# Altium PCB PCB1.PcbDoc
Units mil, origin at the board's own origin, x right, y up, seen from the top; angles counter-clockwise.
Board outline 5850 x 3845 mil, 2 copper layers (Top Layer, Bottom Layer); 70 components, 58 nets, 203 pads, 61 vias.
Unrouted connection lines stored in the file: 44.
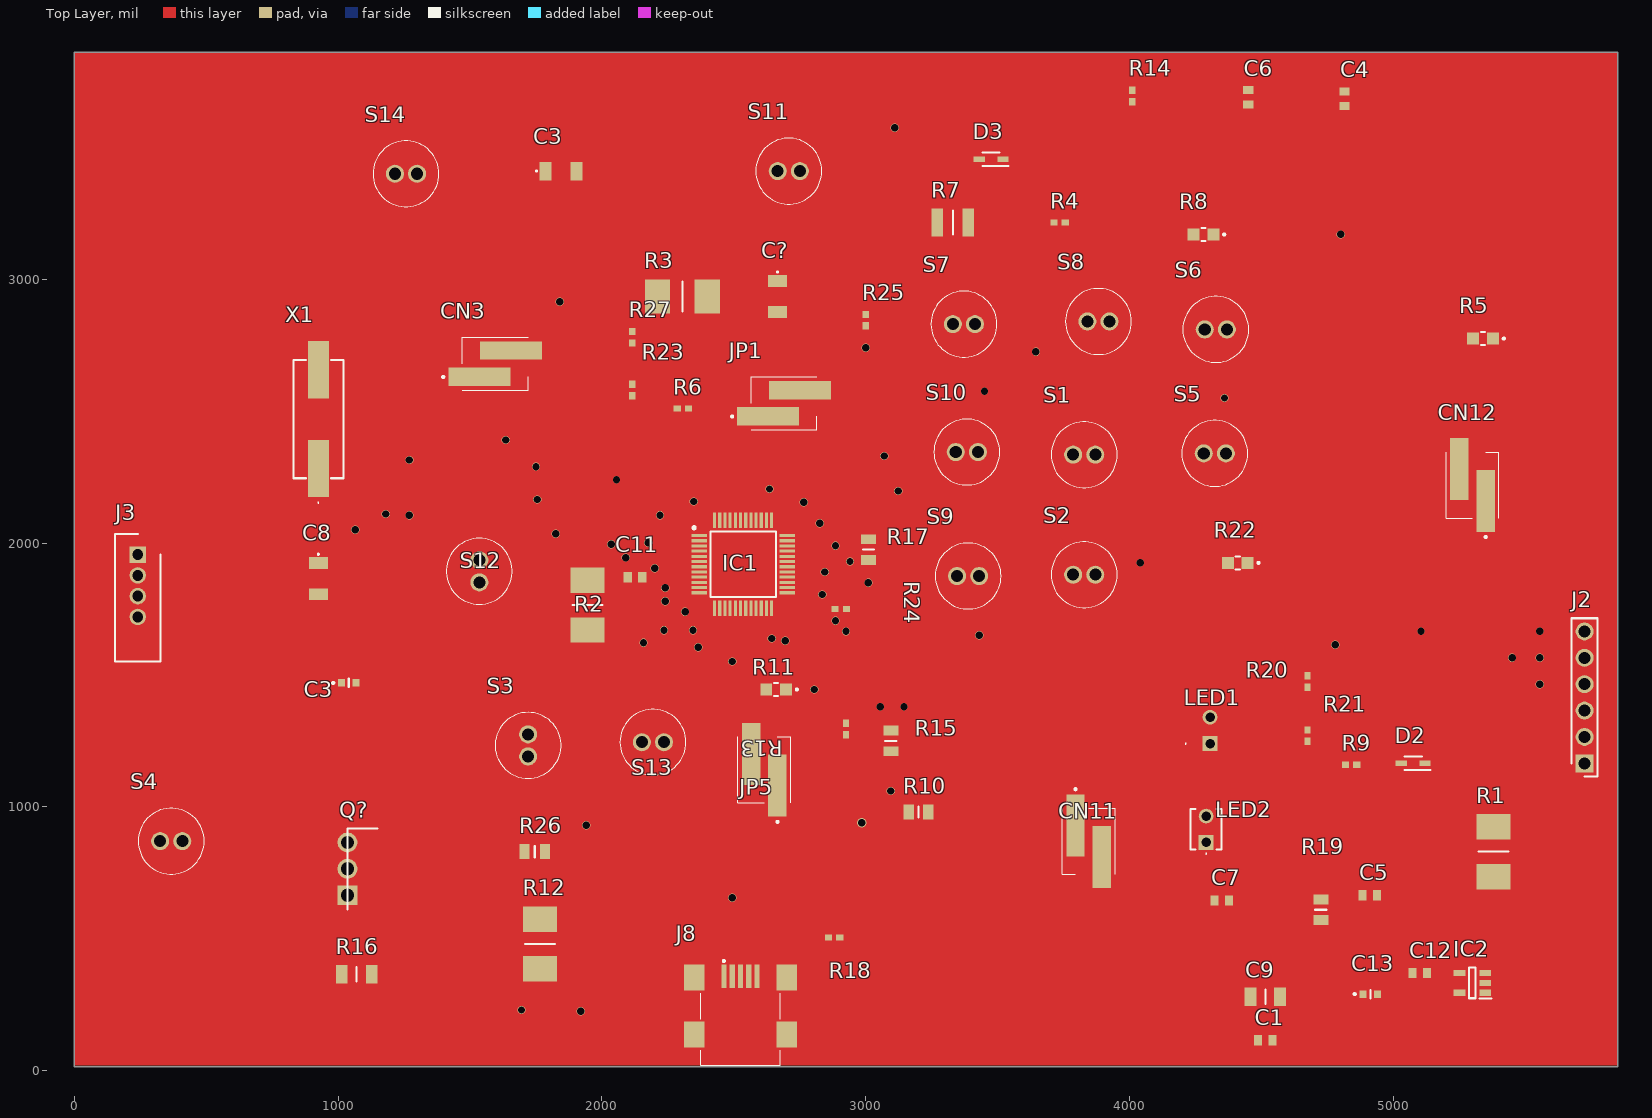
[diagram p0: Top Layer view]
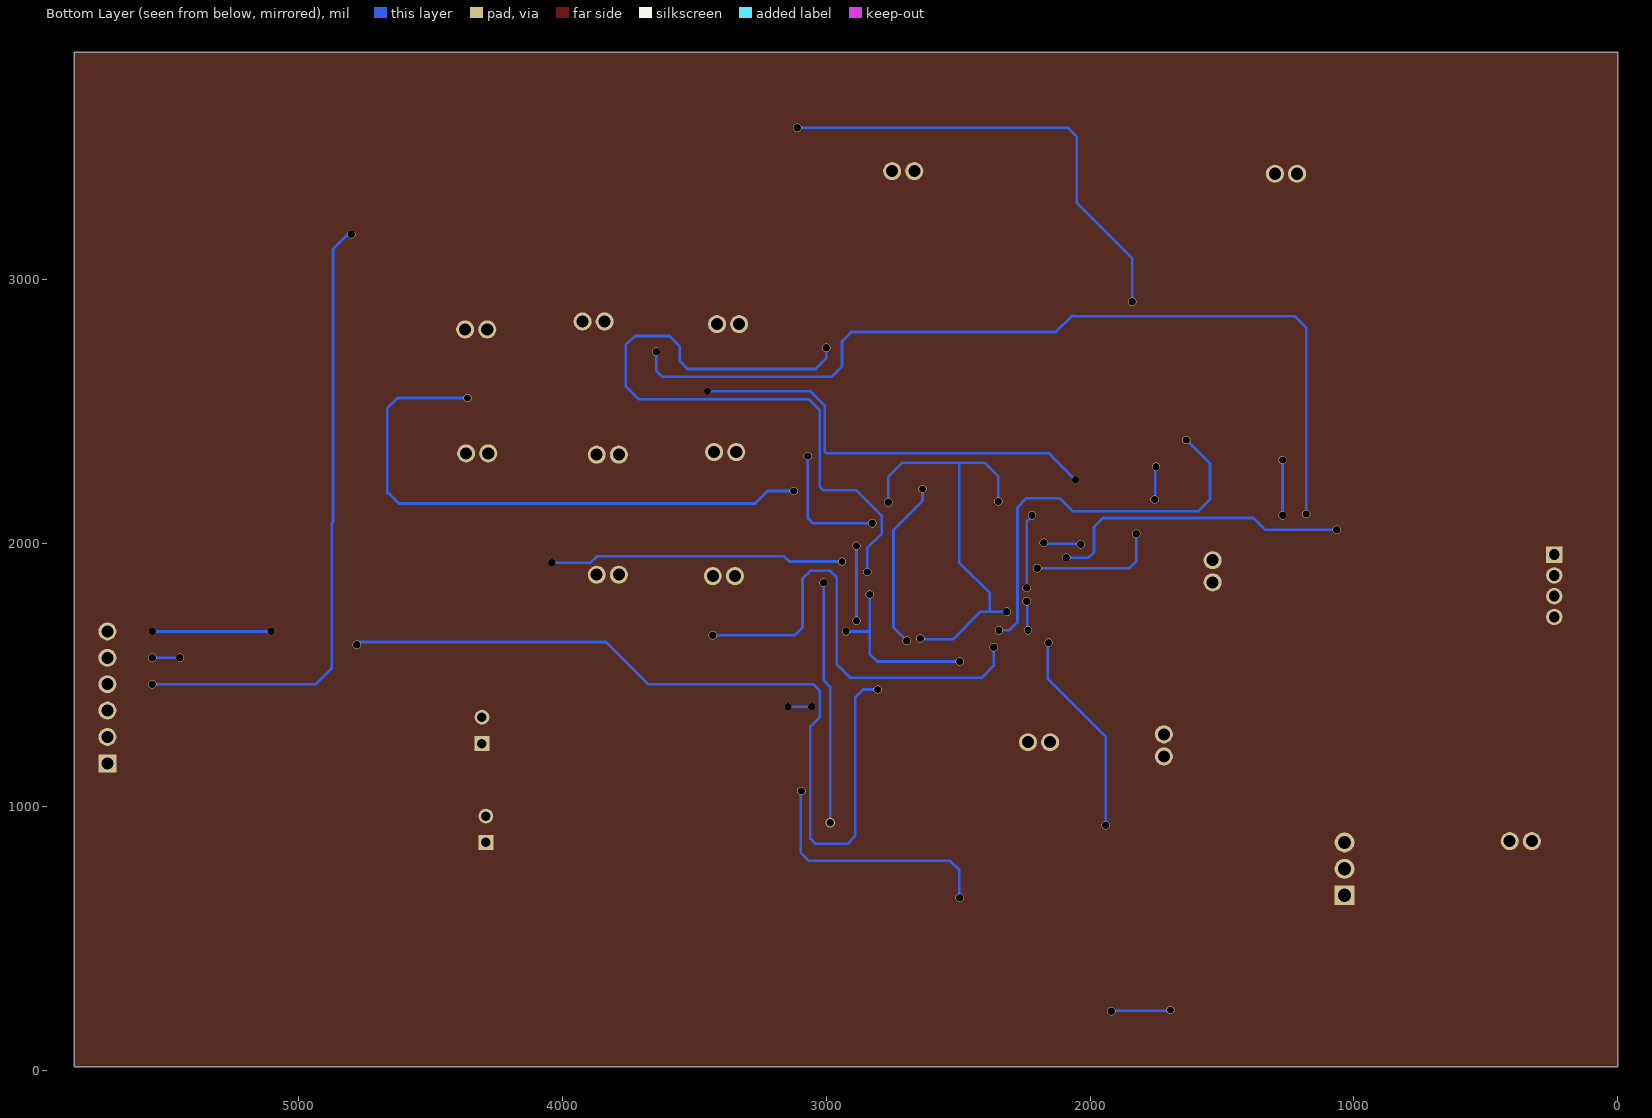
[diagram p1: Bottom Layer view, seen from below]
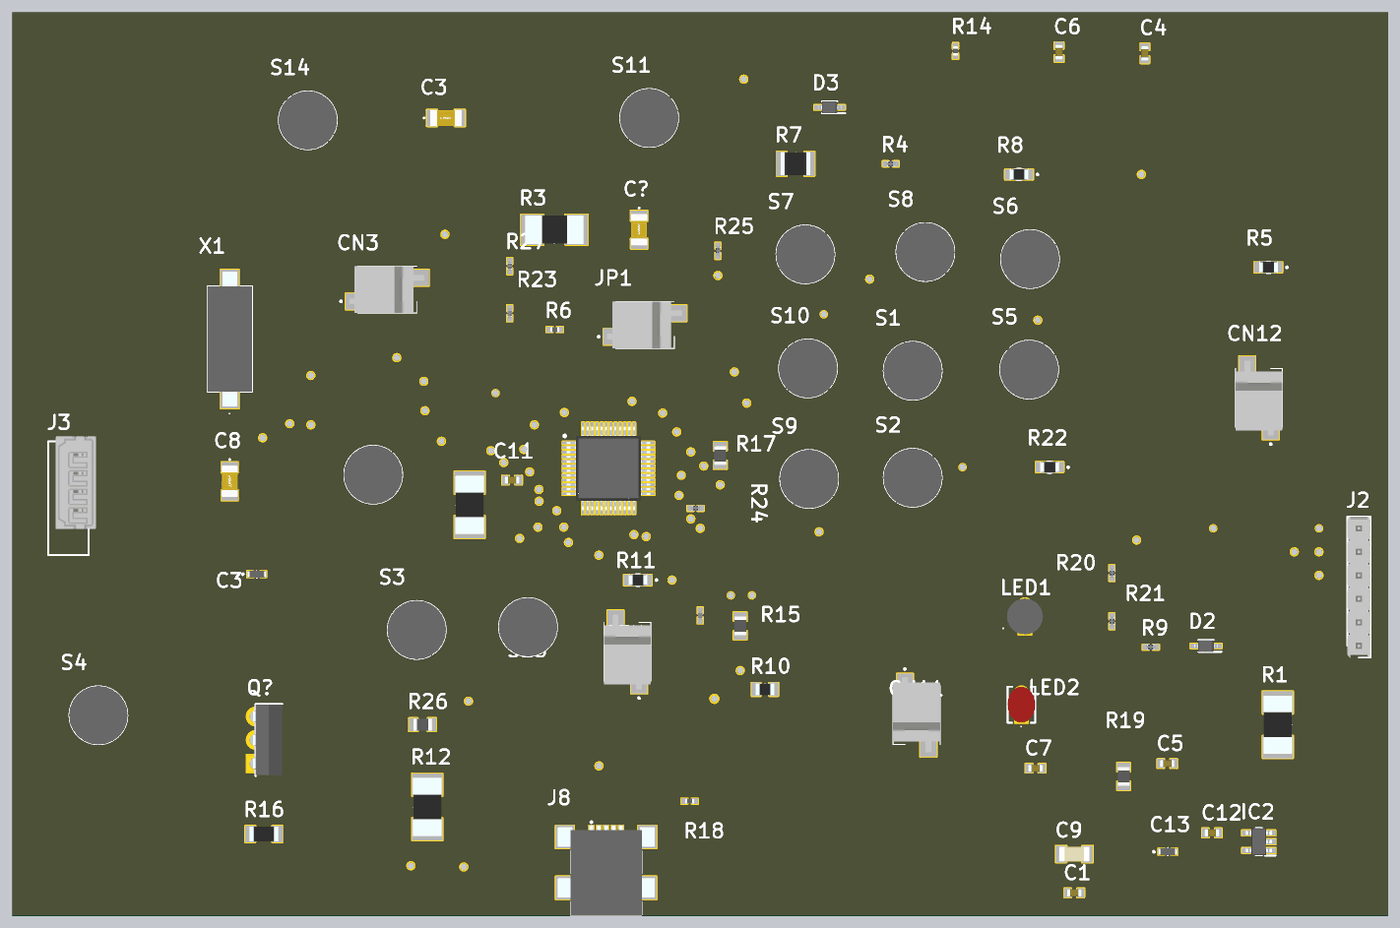
[diagram p2: 3D render of the assembled board from above, using the file's embedded part models]

## Layer stack, top to bottom
Top Solder: solder mask 0.4, Solder Resist, Dk 3.5
Top Layer: signal copper 1.4
Dielectric 1: dielectric 12.6, FR-4, Dk 4.8
Bottom Layer: signal copper 1.4
Bottom Solder: solder mask 0.4, Solder Resist, Dk 3.5

## Board outline
0,15 0,3860 5850,3860 5850,15

## Design rules (kind name [scope] priority, off if disabled: settings)
Clearance [All] p1: gap=10 ignorepadtopadclearanceinfootprint=FALSE
PolygonConnect [All] p1: connectstyle=Relief reliefconductorwidth=10 reliefentries=4 polygonreliefangle="90 Angle" airgapwidth=10
RoutingVias [All] p1: holewidth=28 width=50 viastyle="Through Hole" minholewidth=28 minwidth=50 maxholewidth=28 maxwidth=50
SolderMaskExpansion [All] p1: expansion=4 istentingtop=FALSE
Width [All] p1: maxlimit=10 minlimit=10 preferedwidth=10
30 further rules are at their usual default settings.

## Components (designator, comment, footprint, x,y, rotation, side; value= is the part's Value field where it differs from the comment)
C1 "KAM15AR71H104KM" CAPC1608X90N 4515,115 r0 top
C3 "C1206C200KCGACTU" C1206 1844.06,3410 r0 top
C3 "MAJCT168BB7105KTEA01" MAJx16 1040,1470 r0 top
C4 "KAM15AR71H104KM" CAPC1608X90N 4815,3685 r270 top
C5 "KAM15AR71H104KM" CAPC1608X90N 4910,665 r0 top
C6 "KAM15AR71H104KM" CAPC1608X90N 4450,3690 r270 top
C7 "KAM15AR71H104KM" CAPC1608X90N 4350,645 r0 top
C8 "C1206C200KCGACTU" C1206 925,1865 r270 top
C9 "KGM31GCG2J103JU" CAPC3316X145N 4515,280 r0 top
C11 "KAM15AR71H104KM" CAPC1608X90N 2125,1870 r0 top
C12 "KAM15AR71H104KM" CAPC1608X90N 5100,370 r0 top
C13 "MAJCT168BB7105KTEA01" MAJx16 4912.56,290 r0 top
C? "C1206C200KCGACTU" C1206 2665,2935 r270 top
CN3 "3-647166-2" 36471662 1594.84,2680 r270 top
CN11 "3-647166-2" 36471662 3845,870.16 r180 top
CN12 "3-647166-2" 36471662 5300,2220 r0 top
D2 "BAT60JFILM" SOD2513X117N 5074.88,1165 r180 top
D3 "BAT60JFILM" SOD2513X117N 3475,3455 r180 top
IC1 "STM32F103C8T6TR" QFP50P900X900X160-48N 2535,1920 r0 top
IC2 "LD3985M33R" SOT95P280X145-5N 5299.21,332.4 r180 top
J2 "22-28-4062" HDRV6W66P0X254_1X6_1524X249X838P 5725,1165 r90 top
J3 "53014-0410" SHDR4W60P0X200_1X4_1200X435X1000P 240,1956.22 r90 top
J8 "5075BMR-05-SM" 5075BMR05SM 2525,220 r0 top
JP1 "3-647166-2" 36471662 2690,2530 r270 top
JP5 "3-647166-2" 36471662 2615,1140 r0 top
LED1 "C4SMA-GGY-CU2W37A1" C4SMAGGYCU2W37A1 4305,1240 r90 top
LED2 "C4SMA-RGY-CS4V1BB1" C4SMARGYCS4V1BB1 4290,865 r90 top
Q? "BD139" TO254P290X760X1320-3P 1035,665 r90 top
R1 "CRM2512QJW-103ELF" RESC6331X80N 5380,830 r90 top
R2 "CRM2512QJW-103ELF" RESC6331X80N 1945,1765 r90 top
R3 "CRM2512QJW-103ELF" RESC6331X80N 2305,2935 r180 top
R4 "MCS04020D4701BE000" RESC1005X37N 3735,3215 r0 top
R5 "ERA6AHD220V" ERA6AEB1020V 5340,2775 r180 top
R6 "SFR01MZPF1003" RESC1005X40N 2306.65,2510 r0 top
R7 "CRCW12102K70FKEAHP" RESC3225X70N 3330,3215 r0 top
R8 "ERA6AHD220V" ERA6AEB1020V 4280,3170 r180 top
R9 "MCS04020C1000FE000" RESC1005X37N 4840,1160 r180 top
R10 "TNPW080536K0BEEA" RESC2012X55N 3200,980 r180 top
R11 "MCS04020C1000FE000" RESC1005X37N 2925,1295 r90 top
R12 "CRM2512QJW-103ELF" RESC6331X80N 1765,480 r270 top
R13 "ERA6AHD220V" ERA6AEB1020V 2660,1445 r180 top
R14 "SFR01MZPF1003" RESC1005X40N 4010,3695 r90 top
R15 "WSL080500000ZEA9" RESC2013X84N 3095,1250 r90 top
R16 "CRCW12061K50FKEAHP" RESC3116X65N 1070,365 r180 top
R17 "WSL080500000ZEA9" RESC2013X84N 3010,1975 r90 top
R18 "SFR01MZPF1003" RESC1005X40N 2880,505 r0 top
R19 "WSL080500000ZEA9" RESC2013X84N 4725,610 r270 top
R20 "MCS04020C1000FE000" RESC1005X37N 4675,1475 r90 top
R21 "MCS04020C1000FE000" RESC1005X37N 4675,1270 r270 top
R22 "ERA6AHD220V" ERA6AEB1020V 4410,1925 r180 top
R23 "MCS04020D4701BE000" RESC1005X37N 2115,2580 r90 top
R24 "MCS04020C1000FE000" RESC1005X37N 2905,1750 r0 top
R25 "MCS04020C1000FE000" RESC1005X37N 3000,2845 r90 top
R26 "WSL080500000ZEA9" RESC2013X84N 1745,830 r180 top
R27 "MCS04020D4701BE000" RESC1005X37N 2115,2780 r270 top
S1 "8631CQD2" 8631CQD2 3786.14,2335 r0 top
S2 "8631CQD2" 8631CQD2 3786.14,1880 r0 top
S3 "8631CQD2" 8631CQD2 1720,1191.14 r90 top
S4 "8631CQD2" 8631CQD2 325,870 r0 top
S5 "8631CQD2" 8631CQD2 4365,2340 r180 top
S6 "8631CQD2" 8631CQD2 4285,2810 r0 top
S7 "8631CQD2" 8631CQD2 3330,2830 r0 top
S8 "8631CQD2" 8631CQD2 3840,2840 r0 top
S9 "8631CQD2" 8631CQD2 3346.14,1875 r0 top
S10 "8631CQD2" 8631CQD2 3425,2345 r180 top
S11 "8631CQD2" 8631CQD2 2666.14,3410 r0 top
S12 "8631CQD2" 8631CQD2 1535,1851.14 r90 top
S13 "8631CQD2" 8631CQD2 2151.14,1245 r0 top
S14 "8631CQD2" 8631CQD2 1215,3400 r0 top
X1 "ECS-80-12-5PX-GM-TR" ECS80125PXGMTR 925,2470 r90 top

## Footprints (in the part's own frame and the unit in brackets; to place one, negate y for a bottom-side part, rotate by r counter-clockwise, add the part's x,y. Pads: shape width x height; smd on the part's side, far side on the other; paste and mask are expansions set on the pad)
5075BMR05SM [mm]
  rect 0.5x2.25 smd: 1(-1.6,3.495) 2(-0.8,3.495) 3(0,3.495) 4(0.8,3.495) 5(1.6,3.495)
  rect 2x2.5 smd: 6(-4.45,3.37) 7(-4.45,-2.13) 8(4.45,-2.13) 9(4.45,3.37)
  silkscreen extent -3.85,-5.07 3.85,5.07, body extent -5.25,-5.07 5.25,4.57, height 4.1
8631CQD2 [mm]
  round 1.74 hole 1.16: 1(0,0) 2(2.13,0)
  silkscreen extent -2.11,-3.17 4.24,3.17, body extent -2.11,-3.17 4.24,3.17, height 14.03
36471662 [mm]
  rect 1.78x5.97 smd: 1(1.27,-1.52) 2(-1.27,1.52)
  silkscreen extent -2.54,-5.1 2.54,3.18, body extent -2.54,-4.08 2.54,4, height 10.55
C4SMAGGYCU2W37A1 [mm]
  rect 1.416x1.416 hole 0.91: 1(0,0)
  round 1.416 hole 0.91: 2(2.54,0)
  silkscreen extent -0.05,2.3 0.05,2.4, body extent -0.68,-1.95 3.22,1.95, height 8.9
C4SMARGYCS4V1BB1 [mm]
  rect 1.416x1.416 hole 0.91: 1(0,0)
  round 1.416 hole 0.91: 2(2.54,0)
  silkscreen extent -1.13,-1.5 3.22,1.5, body extent -0.68,-1.5 3.22,1.5, height 10.14
C1206 [mm]
  rect 1.15x1.8 smd: 1(-1.5,0) 2(1.5,0)
  silkscreen extent -2.4,-0.05 -2.3,0.05, body extent -1.7,-0.9 1.7,0.9, height 1.75
CAPC1608X90N [mm]
  rect 0.78x0.99 smd: 1(-0.7,0) 2(0.7,0)
  body extent -0.8,-0.41 0.8,0.41, height 0.9
CAPC3316X145N [mm]
  rect 1.17x1.82 smd: 1(-1.42,0) 2(1.42,0)
  silkscreen extent 0,-0.7 0,0.7, body extent -1.65,-0.8 1.65,0.8, height 1.68
ECS80125PXGMTR [mm]
  rect 5.5x2 smd: 1(-4.75,0) 2(4.75,0)
  silkscreen extent -8.1,-2.4 5.7,2.4, body extent -7.3,-2.4 7.3,2.4, height 4.4
ERA6AEB1020V [mm]
  rect 1.15x1.15 smd: 1(-0.95,0) 2(0.95,0)
  silkscreen extent -2.1,-0.63 0.2,0.63, body extent -1,-0.63 1,0.63, height 0.5
HDRV6W66P0X254_1X6_1524X249X838P [mm]
  rect 1.725x1.725 hole 1.15: 1(0,0)
  round 1.725 hole 1.15: 2(2.54,0) 3(5.08,0) 4(7.62,0) 5(10.16,0) 6(12.7,0)
  silkscreen extent -1.27,-1.24 13.97,1.24, body extent -1.27,-1.24 13.97,1.24, height 9.65
MAJx16 [mm]
  rect 0.7x0.7 smd: 1(-0.7,0) 2(0.7,0)
  silkscreen extent -1.6,-0.4 0,0.4, body extent -0.98,-0.4 0.98,0.4, height 0.9
QFP50P900X900X160-48N [mm]
  rect 1.475x0.3 smd: 1(-4.238,2.75) 2(-4.238,2.25) 3(-4.238,1.75) 4(-4.238,1.25) 5(-4.238,0.75) 6(-4.238,0.25) 7(-4.238,-0.25) 8(-4.238,-0.75) 9(-4.238,-1.25) 10(-4.238,-1.75) 11(-4.238,-2.25) 12(-4.238,-2.75) 25(4.238,-2.75) 26(4.238,-2.25) 27(4.238,-1.75) 28(4.238,-1.25) 29(4.238,-0.75) 30(4.238,-0.25) 31(4.238,0.25) 32(4.238,0.75) 33(4.238,1.25) 34(4.238,1.75) 35(4.238,2.25) 36(4.238,2.75)
  rect 0.3x1.475 smd: 13(-2.75,-4.238) 14(-2.25,-4.238) 15(-1.75,-4.238) 16(-1.25,-4.238) 17(-0.75,-4.238) 18(-0.25,-4.238) 19(0.25,-4.238) 20(0.75,-4.238) 21(1.25,-4.238) 22(1.75,-4.238) 23(2.25,-4.238) 24(2.75,-4.238) 37(2.75,4.238) 38(2.25,4.238) 39(1.75,4.238) 40(1.25,4.238) 41(0.75,4.238) 42(0.25,4.238) 43(-0.25,4.238) 44(-0.75,4.238) 45(-1.25,4.238) 46(-1.75,4.238) 47(-2.25,4.238) 48(-2.75,4.238)
  silkscreen extent -4.85,-3.15 3.15,3.62, body extent -4.5,-4.5 4.5,4.5, height 1.6
RESC1005X37N [mm]
  rect 0.7x0.6 smd: 1(-0.55,0) 2(0.55,0)
  body extent -0.5,-0.25 0.5,0.25, height 0.32
RESC1005X40N [mm]
  rect 0.7x0.6 smd: 1(-0.55,0) 2(0.55,0)
  body extent -0.5,-0.25 0.5,0.25, height 0.4
RESC2012X55N [mm]
  rect 1x1.45 smd: 1(-0.95,0) 2(0.95,0)
  silkscreen extent 0,-0.53 0,0.53, body extent -1,-0.63 1,0.63, height 0.55
RESC2013X84N [mm]
  rect 0.95x1.45 smd: 1(-1,0) 2(1,0)
  silkscreen extent 0,-0.54 0,0.54, body extent -1.01,-0.64 1.01,0.64, height 0.36
RESC3116X65N [mm]
  rect 1.1x1.8 smd: 1(-1.45,0) 2(1.45,0)
  silkscreen extent 0,-0.7 0,0.7, body extent -1.55,-0.8 1.55,0.8, height 0.65
RESC3225X70N [mm]
  rect 1.1x2.7 smd: 1(-1.5,0) 2(1.5,0)
  silkscreen extent 0,-1.15 0,1.15, body extent -1.6,-1.25 1.6,1.25, height 0.7
RESC6331X80N [mm]
  rect 2.45x3.3 smd: 1(-2.4,0) 2(2.4,0)
  silkscreen extent 0,-1.45 0,1.45, body extent -3.15,-1.55 3.15,1.55, height 0.8
SHDR4W60P0X200_1X4_1200X435X1000P [mm]
  rect 1.575x1.575 hole 1.05: 1(0,0)
  round 1.575 hole 1.05: 2(-2,0) 3(-4,0) 4(-6,0)
  silkscreen extent -10.3,-2.17 2,2.17, body extent -7.45,-2.96 2.55,1.39, height 5.85
SOD2513X117N [mm]
  rect 1.085x0.55 smd: 1(-1.14,0) 2(1.14,0)
  silkscreen extent -1.68,-0.64 0.83,0.64, body extent -1.25,-0.64 1.25,0.64, height 1.17
SOT95P280X145-5N [mm]
  rect 1.15x0.6 smd: 1(-1.25,0.95) 2(-1.25,0) 3(-1.25,-0.95) 4(1.25,-0.95) 5(1.25,0.95)
  silkscreen extent -1.83,-1.48 0.33,1.5, body extent -1.4,-1.48 1.4,1.48, height 1.45
TO254P290X760X1320-3P [mm]
  rect 1.92x1.92 hole 1.28: 1(0,0)
  round 1.92 hole 1.28: 2(2.54,0) 3(5.08,0)
  silkscreen extent -1.36,-2.9 6.44,0, body extent -1.26,-2.9 6.34,0.26, height 12.92

## Part data
C1 C4 C5 C6 C7 C11 C12: "Capacitor", Manufacturer_Name="Kyocera AVX", Mouser Part Number=581-KAM15AR71H104KM, Arrow Part Number=KAM15AR71H104KM, Arrow Price/Stock=https://www.arrow.com/en/products/kam15ar71h104km/avx?region=nac, Datasheet Link=https://datasheets.kyocera-avx.com/AutoMLCCKAM.pdf, Height=0.9mm, Manufacturer_Part_Number=KAM15AR71H104KM, Mouser Price/Stock=https://www.mouser.co.uk/ProductDetail/KYOCERA-AVX/KAM15AR71H104KM?qs=Jm2GQyTW%2FbgzS5FHJWrFzQ%3D%3D
C3 C8 C?: "Capacitor", Manufacturer_Name=KEMET, Datasheet Link=https://content.kemet.com/datasheets/KEM_C1009_C0G_HV_SMD.pdf, Manufacturer_Part_Number=C1206C200KCGACTU
C3 C13: "Capacitor", Manufacturer_Name="TAIYO YUDEN", Datasheet Link=https://ds.yuden.co.jp/TYCOMPAS/or/detail?pn=MAJCT168BB7105KTEA01, Height=0.8mm, Manufacturer_Part_Number=MAJCT168BB7105KTEA01
C9: "Capacitor", Manufacturer_Name="Kyocera AVX", Mouser Part Number=581-KGM31GCG2J103JU, Datasheet Link=https://datasheets.kyocera-avx.com/HVKGM.pdf, Height=1.45mm, Manufacturer_Part_Number=KGM31GCG2J103JU, Mouser Price/Stock=https://www.mouser.co.uk/ProductDetail/KYOCERA-AVX/KGM31GCG2J103JU?qs=63Lh8XYXgjt6ivbLeGkCxg%3D%3D
CN3 CN11 CN12 JP1 JP5: "Connector", Manufacturer_Name="TE Connectivity", Mouser Part Number=571-3-647166-2, Arrow Part Number=3-647166-2, Arrow Price/Stock=https://www.arrow.com/en/products/3-647166-2/te-connectivity?region=nac, Datasheet Link=https://www.te.com/commerce/DocumentDelivery/DDEController?Action=showdoc&DocId=Customer+Drawing%7F647166%7FR1%7Fpdf%7FEnglish%7FENG_CD_647166_R1.pdf%7F3-647166-2, Height=10.66mm, Manufacturer_Part_Number=3-647166-2, Mouser Price/Stock=https://www.mouser.co.uk/ProductDetail/TE-Connectivity/3-647166-2?qs=xsTFCgGnzbJU1qz6Np9kzA%3D%3D
D2 D3: "Schottky Diode", Manufacturer_Name=STMicroelectronics, Mouser Part Number=511-BAT60JFILM, Arrow Part Number=BAT60JFILM, Arrow Price/Stock=https://www.arrow.com/en/products/bat60jfilm/stmicroelectronics?region=nac, Datasheet Link=https://www.mouser.jp/datasheet/2/389/cd00001944-1795661.pdf, Height=1.17mm, Manufacturer_Part_Number=BAT60JFILM, Mouser Price/Stock=https://www.mouser.co.uk/ProductDetail/STMicroelectronics/BAT60JFILM?qs=GnFZssByvVVVnMaukcyLZg%3D%3D
IC1: "Integrated Circuit", Manufacturer_Name=STMicroelectronics, Mouser Part Number=511-STM32F103C8T6TR, Arrow Part Number=STM32F103C8T6TR, Arrow Price/Stock=https://www.arrow.com/en/products/stm32f103c8t6tr/stmicroelectronics?region=nac, Datasheet Link=http://media.digikey.com/pdf/Data%20Sheets/ST%20Microelectronics%20PDFS/STM32F103x8,B.pdf, Height=1.6mm, Manufacturer_Part_Number=STM32F103C8T6TR, Mouser Price/Stock=https://www.mouser.co.uk/ProductDetail/STMicroelectronics/STM32F103C8T6TR?qs=5HwTSiuA5HDxFj62n06yag%3D%3D
IC2: "Integrated Circuit", Manufacturer_Name=STMicroelectronics, Mouser Part Number=511-LD3985M33R, Arrow Part Number=LD3985M33R, Arrow Price/Stock=https://www.arrow.com/en/products/ld3985m33r/stmicroelectronics?region=europe, Datasheet Link=http://www.st.com/st-web-ui/static/active/en/resource/technical/document/datasheet/CD00003395.pdf, Height=1.45mm, Manufacturer_Part_Number=LD3985M33R, Mouser Price/Stock=https://www.mouser.co.uk/ProductDetail/STMicroelectronics/LD3985M33R?qs=22WmWNTp1rrPOccVv4HZ7A%3D%3D
J2: "Connector", Manufacturer_Name=Molex, Mouser Part Number=538-22-28-4062, Datasheet Link=https://datasheet.datasheetarchive.com/originals/distributors/SFDatasheet-1/sf-00031037.pdf, Height=8.38mm, Manufacturer_Part_Number=22-28-4062, Mouser Price/Stock=https://www.mouser.com/Search/Refine.aspx?Keyword=538-22-28-4062
J3: "Connector", Manufacturer_Name=Molex, Mouser Part Number=538-53014-0410, Datasheet Link=https://www.molex.com/pdm_docs/sd/530140410_sd.pdf, Height=10mm, Manufacturer_Part_Number=53014-0410, Mouser Price/Stock=https://www.mouser.co.uk/ProductDetail/Molex/53014-0410?qs=TLs3Kb%252BkMqKk8s1WRHwRGw%3D%3D
J8: "Connector", Manufacturer_Name=NELTRON, Datasheet Link=http://www.ibselectronics.com/ibsstore/datasheet/5075BMR-05-SM-CR.pdf, Height=4mm, Manufacturer_Part_Number=5075BMR-05-SM
LED1: "LED", Manufacturer_Name="CREE LED", Mouser Part Number=941-C4SMAGGYCU2W37A1, Datasheet Link=https://cree-led.com/media/documents/C4SMA-1442.pdf, Height=8.8mm, Manufacturer_Part_Number=C4SMA-GGY-CU2W37A1, Mouser Price/Stock=https://www.mouser.co.uk/ProductDetail/Cree-LED/C4SMA-GGY-CU2W37A1?qs=7D1LtPJG0i1gnYL5Rh9Mjg%3D%3D
LED2: "LED", Manufacturer_Name="CREE LED", Mouser Part Number=941-C4SMARGYCS4V1BB1, Arrow Part Number=C4SMA-RGY-CS4V1BB1, Arrow Price/Stock=https://www.arrow.com/en/products/c4sma-rgy-cs4v1bb1/cree-led?region=nac, Datasheet Link=https://cree-led.com/media/documents/C4SMA-1442.pdf, Height=8.8mm, Manufacturer_Part_Number=C4SMA-RGY-CS4V1BB1, Mouser Price/Stock=https://www.mouser.co.uk/ProductDetail/Cree-LED/C4SMA-RGY-CS4V1BB1?qs=7D1LtPJG0i08%2Fw1qRIcnyw%3D%3D
Q?: "Transistor BJT NPN", Manufacturer_Name=STMicroelectronics, Mouser Part Number=511-BD139, Arrow Part Number=BD139, Arrow Price/Stock=https://www.arrow.com/en/products/bd139/stmicroelectronics?region=europe, Datasheet Link=http://www.st.com/web/en/resource/technical/document/datasheet/CD00001225.pdf, Height=2.9mm, Manufacturer_Part_Number=BD139, Mouser Price/Stock=https://www.mouser.co.uk/ProductDetail/STMicroelectronics/BD139?qs=ljbEvF4DwOPW%2FLxHSWYMMA%3D%3D
R1 R2 R3 R12: "Resistor", Manufacturer_Name=Bourns, Mouser Part Number=652-CRM2512QJW-103E, Arrow Part Number=CRM2512QJW-103ELF, Arrow Price/Stock=https://www.arrow.com/en/products/crm2512qjw-103elf/bourns?region=nac, Datasheet Link=http://www.bourns.com/data/global/pdfs/CRM0805_1206_2010.pdf, Height=0.8mm, Manufacturer_Part_Number=CRM2512QJW-103ELF, Mouser Price/Stock=https://www.mouser.co.uk/ProductDetail/Bourns/CRM2512QJW-103ELF?qs=8Wlm6%252BaMh8Rzg3bRHdWGsA%3D%3D
R4 R23 R27: "Resistor", Manufacturer_Name=Vishay, Mouser Part Number=594-MCS04020D4701BE0, Datasheet Link=http://www.vishay.com/docs/28705/mcx0x0xpro.pdf, Height=0.37mm, Manufacturer_Part_Number=MCS04020D4701BE000, Mouser Price/Stock=https://www.mouser.co.uk/ProductDetail/Vishay-Beyschlag/MCS04020D4701BE000?qs=ft9OtscSA3%252BR0DpF5QqL2Q%3D%3D
R5 R8 R13 R22: "Resistor", Manufacturer_Name=Panasonic, Datasheet Link=https://industrial.panasonic.com/cdbs/www-data/pdf/RDM0000/AOA0000C307.pdf, Height=0.6mm, Manufacturer_Part_Number=ERA6AHD220V
R6 R14 R18: "Resistor", Manufacturer_Name="ROHM Semiconductor", Mouser Part Number=755-SFR01MZPF1003, Datasheet Link=https://fscdn.rohm.com/en/products/databook/datasheet/passive/resistor/chip_resistor/sfr-e.pdf, Height=0.4mm, Manufacturer_Part_Number=SFR01MZPF1003, Mouser Price/Stock=https://www.mouser.co.uk/ProductDetail/ROHM-Semiconductor/SFR01MZPF1003?qs=Mv7BduZupUj2RFL5gMaKTg%3D%3D
R7: "Resistor", Manufacturer_Name=Vishay, Mouser Part Number=71-CRCW12102K70FKEAH, Datasheet Link=http://componentsearchengine.com/Datasheets/1/CRCW12102K70FKEAHP.pdf, Height=0.7mm, Manufacturer_Part_Number=CRCW12102K70FKEAHP, Mouser Price/Stock=https://www.mouser.co.uk/ProductDetail/Vishay-Dale/CRCW12102K70FKEAHP?qs=OAzHGkhREL0m0%252BU1n6AaAg%3D%3D
R9 R11 R20 R21 R24 R25: "Resistor", Manufacturer_Name=Vishay, Mouser Part Number=594-MCS04020C1000FE0, Arrow Part Number=MCS04020C1000FE000, Arrow Price/Stock=https://www.arrow.com/en/products/mcs04020c1000fe000/vishay, Datasheet Link=http://www.vishay.com/docs/28705/mcx0x0xpro.pdf, Height=0.37mm, Manufacturer_Part_Number=MCS04020C1000FE000, Mouser Price/Stock=https://www.mouser.co.uk/ProductDetail/Vishay-Beyschlag/MCS04020C1000FE000?qs=7ZE6F4QMOBYkwvQlfbkT8w%3D%3D
R10: "Resistor", Manufacturer_Name=Vishay, Datasheet Link=https://www.vishay.com/docs/31006/tnpw.pdf, Height=0.55mm, Manufacturer_Part_Number=TNPW080536K0BEEA
R15 R17 R19 R26: "Resistor", Manufacturer_Name=Vishay, Mouser Part Number=71-WSL080500000ZEA9, Arrow Part Number=WSL080500000ZEA9, Arrow Price/Stock=https://www.arrow.com/en/products/wsl080500000zea9/vishay?region=nac, Datasheet Link=https://ad.componentsearchengine.com/Datasheets/2/WSL080500000ZEA9.pdf, Height=0.838mm, Manufacturer_Part_Number=WSL080500000ZEA9, Mouser Price/Stock=https://www.mouser.co.uk/ProductDetail/Vishay-Dale/WSL080500000ZEA9?qs=f1l5vAGoKgsImKS87N8TmQ%3D%3D
R16: "Resistor", Manufacturer_Name=Vishay, Mouser Part Number=71-CRCW12061K50FKEAH, Arrow Part Number=CRCW12061K50FKEAHP, Arrow Price/Stock=https://www.arrow.com/en/products/crcw12061k50fkeahp/vishay?region=nac, Datasheet Link=http://componentsearchengine.com/Datasheets/1/CRCW12061K50FKEAHP.pdf, Height=0.65mm, Manufacturer_Part_Number=CRCW12061K50FKEAHP, Mouser Price/Stock=https://www.mouser.co.uk/ProductDetail/Vishay-Dale/CRCW12061K50FKEAHP?qs=k2%2FDWSARqgEwHXAQbL4aEg%3D%3D
S1 S2 S3 S4 S5 S6 S7 S8 S9 S10 S11 S12 S13 S14: "Switch (2-Pin Push)", Manufacturer_Name="C & K COMPONENTS", Mouser Part Number=611-8631-261, Datasheet Link=https://www.ckswitches.com/media/1396/8600.pdf, Height=13.93mm, Manufacturer_Part_Number=8631CQD2, Mouser Price/Stock=https://www.mouser.co.uk/ProductDetail/CK/8631CQD2?qs=ktcBc77oICXe9iPhfEwnkA%3D%3D
X1: "Crystal or Oscillator", Manufacturer_Name=ECS, Mouser Part Number=520-80-12-5PX-GM-TR, Datasheet Link=https://ecsxtal.com/store/pdf/csm-7x.pdf, Height=4.3mm, Manufacturer_Part_Number=ECS-80-12-5PX-GM-TR, Mouser Price/Stock=https://www.mouser.co.uk/ProductDetail/ECS/ECS-80-12-5PX-GM-TR?qs=amGC7iS6iy%252BwzUdIY7WpOA%3D%3D

## Via types
v1: diameter 31.5, hole 28, Top Layer to Bottom Layer, 53 vias
v2: diameter 28, hole 28, Top Layer to Bottom Layer, 7 vias
v3: diameter 35.43, hole 28, Top Layer to Bottom Layer, 1 vias

## Nets (pads, with @x,y where several pads share a name; then routed paths per layer and width w, separated by ;. In a path a pad name is that pad's centre, name@x,y a point inside that pad or via, vN(x,y) a via of type N, cw(c..) or ccw(c..) an arc to the next point about the centre after c; other vN are vias at no path point)
+3V3: R23.1
+3V3_ST_LINK: C1.2 C4.2 C7.2 C9.2 C11.2 C13.2 IC1.1 IC1.9 IC1.24 IC1.36 IC1.48 IC2.5 JP1.2 Q?.3 R14.2 R19.2 R26.2 S4.2 | length 16151.7
  Top Layer w9.8: 2290,2210 2347.5,2210 2405,2210
  Top Layer w10: S4.2 411.36,867.5 905,867.5 ; Q?.3 1032.5,867.5 905,867.5 ; R26.2 1565,830 ; v1@1950,930 v1(1940,930) 1590,930 1565,905 1565,830 ; C11.2 2195,1870 ; v1(2157.5,1622.5) 2160,1625 2160,1675 2195,1710 2195,1740 ; 2290,2210 2270,2190 2270,2055 2296.73,2028.27 IC1.1 ; v1(2315,1740) 2195,1740 ; v1@2345,2155 v1(2347.5,2157.5) 2347.5,2210 ; IC1.9 2367.36,1870 2195,1870 ; 2405,2210 2425,2190 IC1.48@2425,2086.85 ; v1@2640,1635 v1(2643.27,1638.27) 2643.27,1696.73 ; IC1.24 2643.27,1696.73 ; IC1.36@2690,2030 2765,2030 ; JP1.2 3070,2580 ; v1(2765,2155) 2765,2030 ; v1(2825,2075) 2824.25,2074.25 2824.25,2044.25 2810,2030 2765,2030 ; v2@3065,1385 2940,1385 2905,1420 2905,1580 2820,1665 2675,1665 2643.27,1696.73 ; v1(3070,2330) 3070,2580 ; v2(3145,1380) 3150,1385 3510,1385 3575,1320 3575,570 3630,515 4570,515 ; R14.2 4010,3780 4030,3800 ; C7.2 4535,645 4570,610 4570,515 ; C1.2 4725,115 ; C9.2 4725,280 ; R19.2 4725,390 ; C4.2 4815,3600 4835,3580 4940,3580 4940.86,3579.14 4949.14,3579.14 4980,3610 4980,3770 4950,3800 4030,3800 ; C13.2 4942.62,292.5 5120,292.5 ; IC2.5 5247.5,292.5 5120,292.5 ; 905,867.5 905,1035 945,1075 1270,1075 1305,1040 1305,880 1355,830 1565,830 ; 2195,1740 2195,1870 ; 3070,2580 3070,3760 3110,3800 3195,3800 3195.86,3800.86 3204.14,3800.86 3205,3800 4030,3800 ; 4570,515 4570,420 4600,390 4725,390 ; 4725,115 5090,115 5120.86,145.86 5120.86,154.14 5120,155 5120,292.5 ; 4725,115 4725,280 ; 4725,280 4725,390
  Bottom Layer w10: v1(1940,930) 1940,1265 2160,1485 2160,1620 v1(2157.5,1622.5) ; v1(2315,1740) 2375,1740 ; v1(2347.5,2157.5) 2347.5,2252.5 2400,2305 2495,2305 ; v1(2643.27,1638.27) 2640,1635 2520,1635 2415,1740 2375,1740 ; v1(2765,2155) 2765,2250 2710,2305 2495,2305 ; v1(2825,2075) 3050,2075 3070,2095 v1(3070,2330) ; v2(3055,1380) v2(3145,1380) ; 2375,1740 2380,1745 2380,1810 2495,1925 2495,2305
"AIN 1": R9.2
E5V: D3.2 R7.1 | length 651.8
  Top Layer w10: R7.1 3160,3215 3130,3245 3130,3435 3150,3455 D3.2
GND: C1.1 C3.1@1012.44,1470 C3.2 C4.1 C5.1 C5.2 C6.1 C7.1 C8.2 C9.1 C11.1 C12.1 C13.1 C?.2 CN11.1 CN11.2 CN12.1 CN12.2 D3.1 IC1.8 IC1.20 IC1.23 IC1.35 IC1.47 IC2.1 IC2.2 IC2.3 J2.3 J8.5 J8.6 J8.7 J8.8 J8.9 JP5.2 LED1.2 R1.1 R2.1 R3.1 R4.2 R6.1 R10.1 R18.2 R27.1 S8.2 S12.1 | length 646.4
  Top Layer w10: R6.1 2245,2510 2244.14,2510.86 2240.86,2510.86 2215,2485 2215,2400 2214.14,2399.14 2214.14,2390.86 2240,2365 2345,2365 2449.52,2260.48 ; IC1.47@2449.05,2086.85 2449.05,2260 ; R4.2 R4.2@3762.51,3220.86
LED_STLINK: IC1.30
MCO: S11.2
NetC12_2: C12.2 IC2.4 | length 122.5
  Top Layer w10: C12.2 5127.76,369.8 IC2.4
NetC?_1: C?.1 R25.2 S11.1 | length 1032.2
  Top Layer w10: C?.1 2666.14,2995.2 2666.14,3170 2666.14,3175 ; S11.1 2666.14,3175 ; R25.2 3000,3130 2960,3170 2671.14,3170 2666.14,3175
NetD2_1: D2.1 J2.1 R1.2 | length 846.1
  Top Layer w10: D2.1 5379.14,1165 ; R1.2 5380,1045.5 5379.14,1046.36 5379.14,1165 ; J2.1 5379.14,1165
NetD2_2: D2.2 R9.1 | length 170.4
  Top Layer w10: R9.1 4864.15,1162.5 5027.5,1162.5 D2.2
NetIC1_2: IC1.2 R3.2 | length 1307.8
  Top Layer w10: R3.2 2070,2935 2025,2890 2025,2475 2150,2350 2150,2090 2230,2010 2366.73,2010 IC1.2
NetIC1_3: IC1.3 R2.2 | length 566.3
  Top Layer w10: R2.2 1945,1970 1970,1995 v1(2035,1995) v1@2050,1995 ; v1(2175,2000.75) 2210.97,2000.75 2221.72,1990 2235.11,1990 2236.21,1988.9 IC1.3
  Bottom Layer w10: v1(2035,1995) 2037.87,1997.87 2172.13,1997.87 v1(2175,2000.75)
NetIC1_10: IC1.10 R23.2 R27.2 | length 1222.3
  Top Layer w10: R23.2 2115,2680 ; R27.2 2115,2680 ; v1(2220,2105) 2215,2105 2175,2145 2175,2660 2155,2680 2115,2680 ; v1(2239.25,1830) 2240.98,1831.73 2271.73,1831.73 2290,1850 IC1.10@2368.15,1850
  Bottom Layer w10: v1(2220,2105) 2220,2101.52 2240,2081.52 2240,1830.75 v1(2239.25,1830)
NetIC1_21: IC1.21 JP5.1 R26.1 | length 2433.1
  Top Layer w10: R26.1 2660,830 ; IC1.21 2584.21,1645.79 2635,1595 2800,1595 2850,1545 2850,855 2825,830 2660,830 ; JP5.1 2660,1075.16 2660,830
NetIC1_28: IC1.28
NetIC1_29: IC1.29 R25.1 | length 2876.7
  Top Layer w10: IC1.29 v1(2844.53,1890.47) v1@2845,1890 ; v1(3000,2740) R25.1
  Bottom Layer w10: v1(2844.53,1890.47) 2844.53,1980.47 2790,2035 2790,2105 2885,2200 3010,2200 3025,2215 3025,2505 3065,2545 3710,2545 3760,2595 3760,2750 3725,2785 3595,2785 3555,2745 3555,2690 3525,2660 3040,2660 3000,2700 v1(3000,2740)
NetIC1_39: IC1.39 JP1.1 R4.1 R7.2 | length 2890.1
  Top Layer w10: IC1.39 2603.9,2228.9 2605,2230 2605,2255 ; JP1.1 2440,2480 2420,2460 2420,2355 2440,2335 2590,2335 2605,2320 2605,2255 ; R7.2 3390.71,3213.35 3510.35,3213.35 ; R4.1 3711.69,3213.35 3510.35,3213.35 ; 2605,2255 3070,2255 3110,2295 3110,3010 3140,3040 3485,3040 3510.35,3065.35 3510.35,3213.35
NetIC1_43: IC1.43 R6.2 | length 565.3
  Top Layer w10: R6.2 2360,2510 2385,2485 2385,2353.28 2433.28,2305 2505,2305 2525.16,2284.84 IC1.43
NetJ2_2: J2.2 R5.1 | length 1793.9
  Top Layer w10: R5.1 5475,2775 5510,2740 5510,1340 5585.86,1264.14 5589.14,1264.14 5590,1265 J2.2
NetJ2_4: J2.4 R8.1 | length 3034.4
  Top Layer w10: R8.1 v1(4800,3170) ; v1(5555,1465) J2.4
  Bottom Layer w10: v1@4810,3175 4870,3115 4870,2080 4875,2075 4875,1525 4935,1465 v1(5555,1465)
NetJ2_5: J2.5 R13.1 | length 4312.4
  Top Layer w10: R13.1 v1(2805,1445) v1@2820,1445 ; v1(4780,1615) 5380,1615 5430,1565 v1(5450,1565) ; v1(5555,1565) J2.5
  Bottom Layer w10: v1(2805,1445) 2860,1445 2890,1415 2890,890 2920,860 3040,860 3060,880 3060,1305 3024.14,1340.86 3024.14,1439.14 3050,1465 3675,1465 3835,1625 4770,1625 v1(4780,1615) ; v1(5450,1565) v1(5555,1565)
NetJ2_6: J2.6 R22.1 | length 1481.9
  Top Layer w10: R22.1 4715,1925 4715.86,1925.86 4770,1871.72 4770,1720 4820,1670 4825,1670 4830,1665 v2(5105,1665) ; v2@5550,1670 v2(5555,1665) J2.6
  Bottom Layer w10: v2(5105,1665) v2(5555,1665)
NetJ3_1: J3.1 S3.2 S4.1 | length 2748.7
  Top Layer w10: J3.1 141.22,1956.22 100,1915 100,1530 99.14,1529.14 99.14,1520.86 170,1450 265,1450 325,1390 325,1280 ; S4.1 325,1280 ; S3.2 330,1275 325,1280
NetJ3_2: J3.2 S5.2 S6.1 | length 5446.7
  Top Layer w10: J3.2 727.52,1877.48 760,1845 760,1705 800,1665 1045,1665 1105,1725 1105,2195 1150,2240 v2(2055,2240) v2@2060,2245 ; v2(3450,2575) 3450.86,2575.86 3459.14,2575.86 3460,2575 4283.07,2575 ; S5.2 4283.07,2341.93 4283.07,2575 ; S6.1 4283.07,2808.07 4283.07,2575
  Bottom Layer w10: v2(2055,2240) 2155,2340 2999.14,2340 3005,2345.86 3005,2520 3060,2575 v2(3450,2575)
NetJ3_3: J3.3 S7.2 S8.1 | length 5498.9
  Top Layer w10: J3.3 671.26,1798.74 700,1770 700,1655 730,1625 1135,1625 1180,1670 v1(1180,2110) ; S7.2 3418.86,2835 3645,2835 ; v1(3645,2725) 3645,2835 ; S8.1 3835,2835 3645,2835
  Bottom Layer w10: v1(1180,2110) 1180,2815 1225,2860 2060,2860 2060.86,2860.86 2069.14,2860.86 2130,2800 2905,2800 2940,2765 2940,2670 2980,2630 3620,2630 3645,2655 v1(3645,2725)
NetJ3_4: J3.4 S9.2 S10.1 | length 5100.5
  Top Layer w10: J3.4 575,1720 615,1680 615,1355 660,1310 1455,1310 1500,1355 1500,1460 1545,1505 2200,1505 2300,1605 v1(2365,1605) ; S10.1 3427.5,2342.5 3427.5,1877.5 S9.2 v1(3430,1650)
  Bottom Layer w10: v1(2365,1605) 2365,1535 2410,1490 2910,1490 2960,1540 2960,1870 2985,1895 3060,1895 3090,1865 3090,1680 3120,1650 v1(3430,1650) v1@3440,1650
NetJ8_2: J8.2 R15.1 | length 1416.3
  Top Layer w10: J8.2 2493.88,357.97 2493.88,654.63 v1(2494.25,655) ; v1(3095,1060) R15.1
  Bottom Layer w10: v1(2494.25,655) 2495,655.75 2495,760 2530,795 3065,795 3095.86,825.86 3095.86,1059.14 v1(3095,1060)
NetJ8_3: J8.3 R16.1 R17.1 | length 3949.9
  Top Layer w10: R16.1 1305,365 1335,335 1335,265 1370,230 v1(1695,230) ; v1(1920,225) 2080,225 2105,250 2105,650 2170,715 2519.14,715 ; J8.3 2525,709.14 2519.14,715 ; v3(2985,940) 2985,775 2925,715 2519.14,715 ; v1(3010,1850) R17.1
  Bottom Layer w10: v1(1695,230) 1697.5,227.5 1917.5,227.5 v1(1920,225) ; v3(2985,940) 2985,1455 3010,1480 v1(3010,1850)
NetJ8_4: J8.4 R18.1 | length 428.8
  Top Layer w10: J8.4 2556.5,466.5 2595,505 2853.35,505 R18.1@2858.35,500
NetLED1_1: LED1.1 R21.2 | length 607.3
  Top Layer w10: LED1.1 4305,1140 4340,1105 4640,1105 4675,1140 R21.2
NetLED2_1: LED2.1 R19.1 | length 616.7
  Top Layer w10: LED2.1 4285,860 4285,785 4315,755 4685,755 4725,715 R19.1
NetLED2_2: LED2.2 R20.2 | length 1569.1
  Top Layer w10: LED2.2 4290,1065 4255,1100 4090,1100 4040,1150 4040,1595 4060,1615 4630,1615 4630.86,1615.86 4634.14,1615.86 4670,1580 4670,1501.65 R20.2
NetQ?_1: Q?.1 R10.2 R11.1 R12.1 | length 3135.7
  Top Layer w10: Q?.1 1035,555 1075,515 1275,515 1305,545 1305,705 1350,750 1760,750 ; R12.1 1765,745 1760,750 ; R11.1@2925,1283.35 2925,980 ; R10.2 2925,980 ; 1760,750 1765,750 2890,750 2925,785 2925,980
NetQ?_2: Q?.2 R16.2 | length 563.1
  Top Layer w10: R16.2@1012.91,367.09 957.91,367.09 930,395 930,740 965,775 1025,775 Q?.2
NetR20_1: R20.1 R21.1 | length 161.7
  Top Layer w10: R21.1 R20.1
NetS13_1: S13.1
NetS14_1: S14.1
"OSC IN": C3.1@1785,3410 IC1.5 X1.2 | length 4334.8
  Top Layer w10: X1.2 925,3690 980,3745 1470,3745 1530,3685 1530,3415.86 ; C3.1@1785,3410 1535.86,3410 1530,3415.86 ; IC1.5 2247.29,1949.53 2226.82,1970 2130,1970 2085,2015 2085,2330 1940,2475 1940,2920 1895,2965 1585,2965 1530,3020 1530,3415.86
"OSC OUT": C8.1 IC1.6 X1.1 | length 1951.8
  Top Layer w10: C8.1 925,2050 ; X1.1 925,2050 ; v1(1065,2050) 925,2050 ; v1(2090,1945) 2223.54,1945 2239.01,1929.53 IC1.6@2375,1929.53
  Bottom Layer w10: v1(1065,2050) 1335,2050 1380,2095 1950,2095 1985,2060 1985,1965 2005,1945 v1(2090,1945)
STLINK_RX: CN3.2 IC1.13 S13.2 | length 2969.9
  Top Layer w10: v1@1635,2395 v1(1635,2390.86) 1640.86,2385 1700,2385 1865,2550 1865,2690 1825,2730 CN3.2 ; S13.2 2235,1485 2270,1520 2380,1520 2426.73,1566.73 2426.73,1670 ; v1(2345,1670) 2426.73,1670 ; IC1.13 2426.73,1670
  Bottom Layer w10: v1(1635,2390.86) 1545,2300.86 1545,2165 1590,2120 2065,2120 2115,2170 2240,2170 2275,2135 2275,1700 2305,1670 v1(2345,1670)
STLINK_TX: CN3.1 IC1.12 S14.2 | length 3411.3
  Top Layer w10: v1(1270,2105) 1270,1610 1305,1575 2230,1575 2240,1585 v1@2240,1675 ; v1(1270,2315) 1270,2635.86 ; S14.2 1300,3400 1310,3390 1310,3090 1270,3050 1270,2635.86 ; CN3.1 1275.86,2630 1270,2635.86 ; v1(2240,1780) 2271.73,1811.73 IC1.12
  Bottom Layer w10: v1(1270,2105) v1(1270,2315) ; v1(2235,1670) 2237.5,1672.5 2237.5,1777.5 v1(2240,1780)
"STM RST": C6.2 IC1.7 R14.1 S12.2 | length 5310.1
  Top Layer w10: S12.2 1715,1935 1755,1975 1755,2035 ; v1@1750,2175 1755,2170 v1(1755,2165) 1755,2035 ; v1(1750,2290) 1750,2370 1905,2525 1905,2850 v1(1840,2915) ; v1(1825,2035) 1755,2035 ; v1(2200,1905) 2204.53,1909.53 2339.05,1909.53 2339.68,1910.16 IC1.7 ; v1(3110,3575) 4010,3575 ; R14.1 4010,3575 ; C6.2 4450,3600 4425,3575 4010,3575
  Bottom Layer w10: v1(1750,2290) 1752.5,2287.5 1752.5,2167.5 v1(1755,2165) ; v1(1825,2035) 1825,1930 1850,1905 v1(2200,1905) ; v1(1840,2915) 1840,3080 2050,3290 2050,3540 2085,3575 v1(3110,3575)
STM_JTCK: IC1.37 S6.2 | length 3038.7
  Top Layer w10: IC1.37 2643.27,2109.98 2644.17,2110.89 2644.17,2125.89 2645,2126.72 2645,2140 2700,2195 3120,2195 v1(3122.5,2197.5) ; v1(4360,2550) 4364.11,2554.11 4364.11,2805.25 S6.2
  Bottom Layer w10: v1(3122.5,2197.5) 3222.5,2197.5 3270,2150 4610,2150 4610.86,2149.14 4619.14,2149.14 4660,2190 4664.14,2190 4664.14,2510.86 4625,2550 v1(4360,2550)
STM_JTCS: IC1.34 | length 108.6
  Top Layer w10: IC1.34 2808.9,1988.9 2810,1990
STM_JTMS: S10.2
"T JTCK": IC1.15 IC1.26 R5.2 S1.2 S2.2 S3.1 S5.1 S9.1 | length 7050.8
  Top Layer w10: S3.1 1720,1040 1765,995 2365,995 2425,1055 2425,1510 2465.86,1550.86 ; IC1.15@2465,1753.15 2465,1560 2465.86,1559.14 2465.86,1550.86 ; v1@2495,1550 v1(2494.14,1550.86) 2465.86,1550.86 ; IC1.26@2701.85,1830 2810,1830 v1(2835,1805) ; v1(2925,1665) 3015,1665 3075,1605 3346.14,1605 ; S9.1 3346.14,1605 ; S2.2 3870,2130 ; S5.1 4370,2345 4570,2345 ; R5.2 4620,2775 4570,2725 4570,2345 ; 3346.14,1605 3595,1605 3625,1635 3625,2085 3624.14,2085.86 3663.28,2125 3865,2125 3870,2130 ; 3870,2130 S1.2 4035,2335 4080,2290 4080,2155 4120,2115 4530,2115 4570,2155 4570,2345
  Bottom Layer w10: v1(2494.14,1550.86) 2805.86,1550.86 2835,1580 2835,1665 ; v1(2835,1805) 2835,1665 ; v1(2925,1665) 2835,1665
"T JTDI": IC1.17
"T JTDO": IC1.16
"T JTMS": IC1.27 R8.2 R24.2 S7.1 | length 2926.7
  Top Layer w10: IC1.27@2701.85,1850 2900,1850 2935,1815 3000,1815 ; R24.2@2917.87,1756.81 2924.68,1750 R24.2 2985,1750 3000,1765 3000,1815 ; R8.2@4242.6,3160 4232.6,3170 3615,3170 3575,3130 3575,3045 3530,3000 3365,3000 3330,2965 S7.1 3195,2830 3170,2805 3170,1890 3095,1815 3000,1815
"T SWDIO IN": IC1.25 R24.1 | length 207.1
  Top Layer w10: IC1.25 2744.98,1811.73 2746.72,1810 2765,1810 2825,1750 R24.1
"T SWO": IC1.31 R22.2 | length 1682.2
  Top Layer w10: IC1.31@2701.85,1928.9 2938.9,1928.9 v1(2940,1930) ; v2@4050,1925 R22.2 R22.2@4375,1925
  Bottom Layer w10: v1(2940,1930) 3140,1930 3160,1950 3869.65,1950 3894.65,1925 v2(4040,1925)
T_JRST: IC1.19
T_NRST: IC1.18 R13.2 | length 385.2
  Top Layer w10: IC1.18@2525,1753.15 2525,1480 2560,1445 R13.2
U5V: J8.1 R12.2 | length 1575.4
  Top Layer w10: R12.2 1765,220 1815,170 2135,170 2180,215 2180,605 2225,650 2415,650 2462.01,602.99 J8.1
USB_DM: IC1.32 R17.2 | length 476.4
  Top Layer w10: IC1.32 2756.09,1949.53 2756.72,1948.9 2825.47,1948.9 2826.1,1949.53 2909.53,1949.53 2935,1975 2935,2065 2955,2085 2990,2085 3010,2065 R17.2
USB_DP: IC1.33 R15.2 | length 1022.2
  Top Layer w10: IC1.33@2701.85,1968.9 2817.18,1968.9 2838.28,1990 v1(2885,1990) ; v1(2885,1705) 2885,1658.28 2984.14,1559.14 2985,1560 3055,1560 3095,1520 R15.2
  Bottom Layer w10: v1(2885,1705) v1(2885,1990)
USB_RENUMn: IC1.38 R11.2 | length 1245.4
  Top Layer w10: IC1.38@2625,2086.85 2625,2160 2635,2170 v1(2635,2205) ; v1(2695,1630) 2820,1630 2875,1575 2875,1415 2925,1365 R11.2
  Bottom Layer w10: v1(2635,2205) 2635,2160 2745,2050 2745,1680 v1(2695,1630)
pads on no net: IC1.4 IC1.11 IC1.14 IC1.22 IC1.40 IC1.41 IC1.42 IC1.44 IC1.45 IC1.46 S1.1 S2.1

## Other copper
Top Layer:
  rectangle net GND: 0,20 5850,3860

## Silkscreen, mask and mechanical layers (free items; w line width, h text height)
Mechanical 1:
  the board outline again, w10